# Altium PCB docking-control.PcbDoc
Units mil, origin at the board's own origin, x right, y up, seen from the top; angles counter-clockwise.
Board outline 2305 x 3965 mil, 2 copper layers (Top Layer, Bottom Layer); 18 components, 22 nets, 98 pads, 0 vias.
Unrouted connection lines stored in the file: 3.
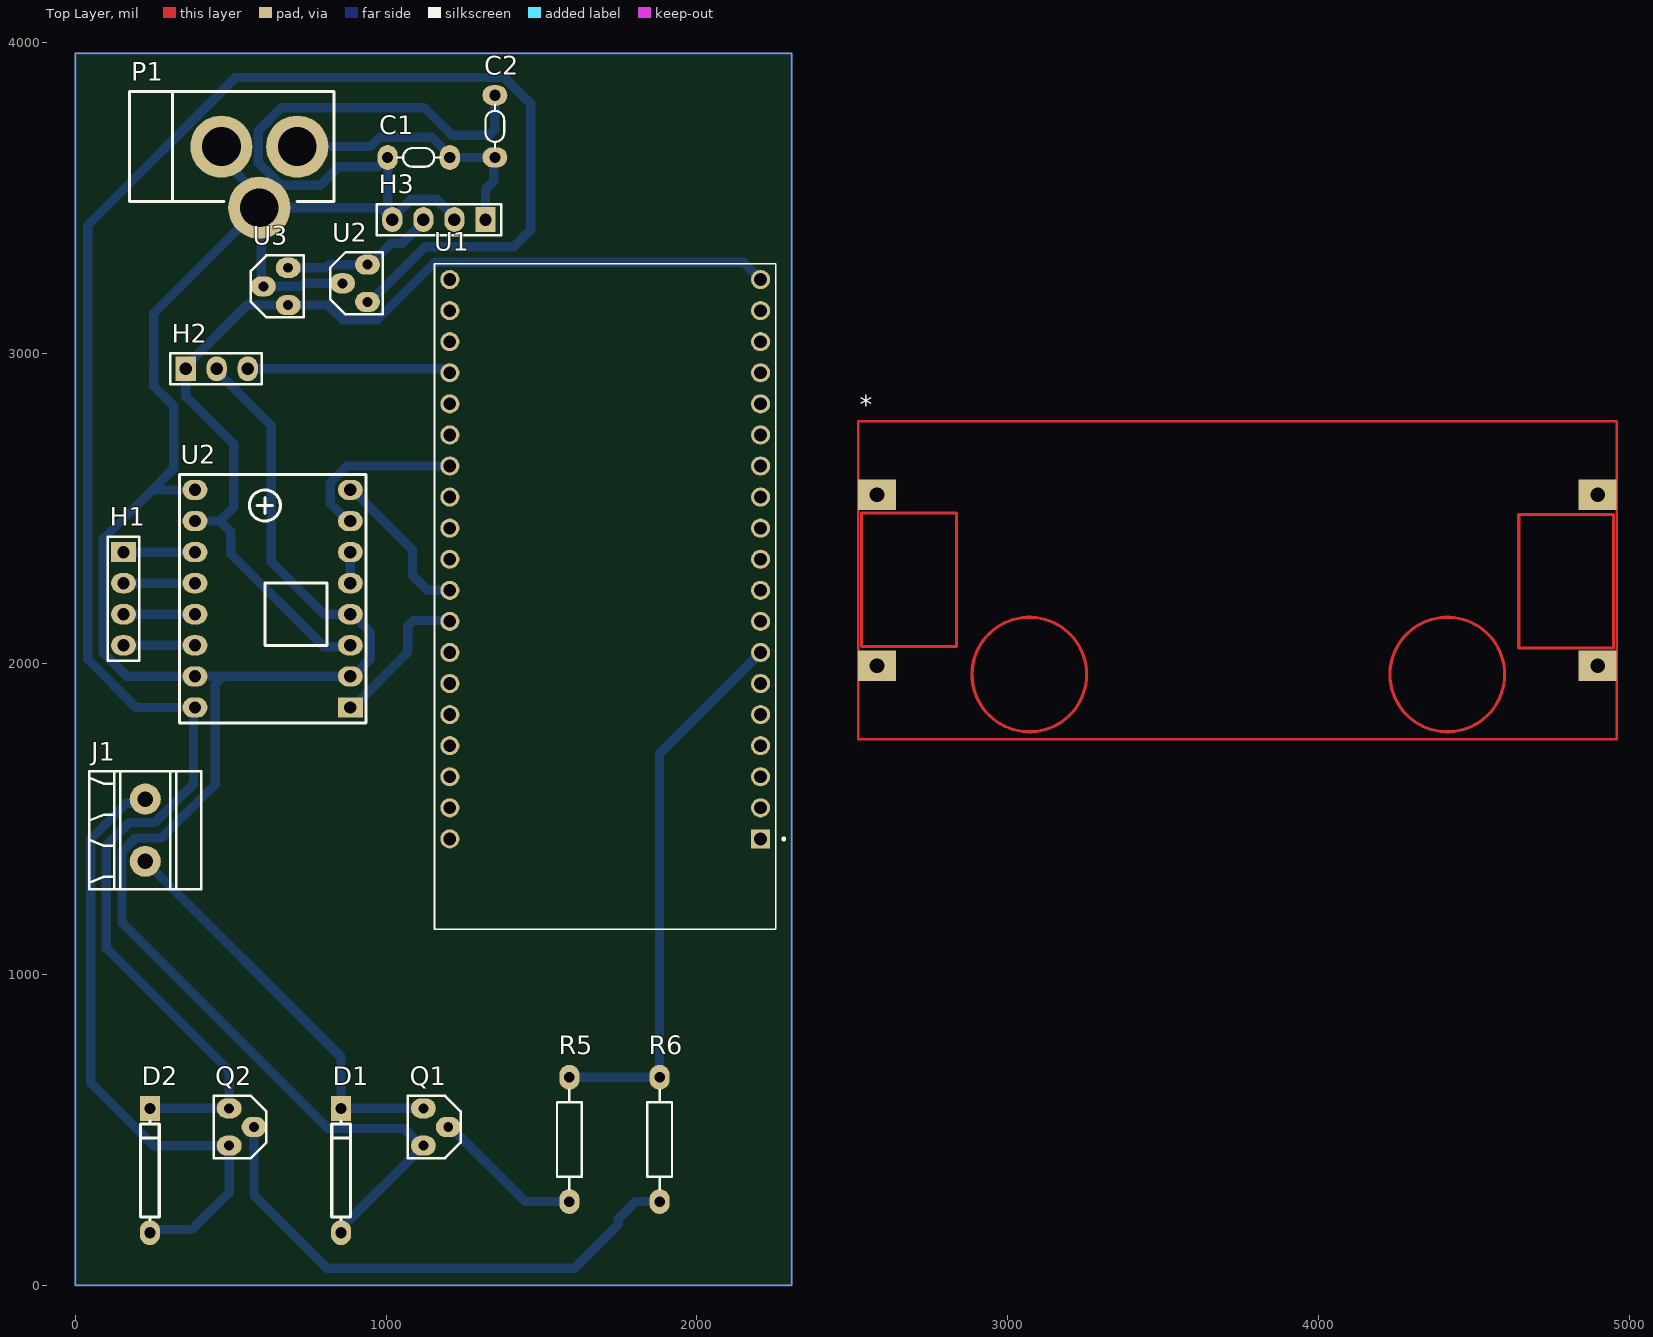
[diagram p0: Top Layer view]
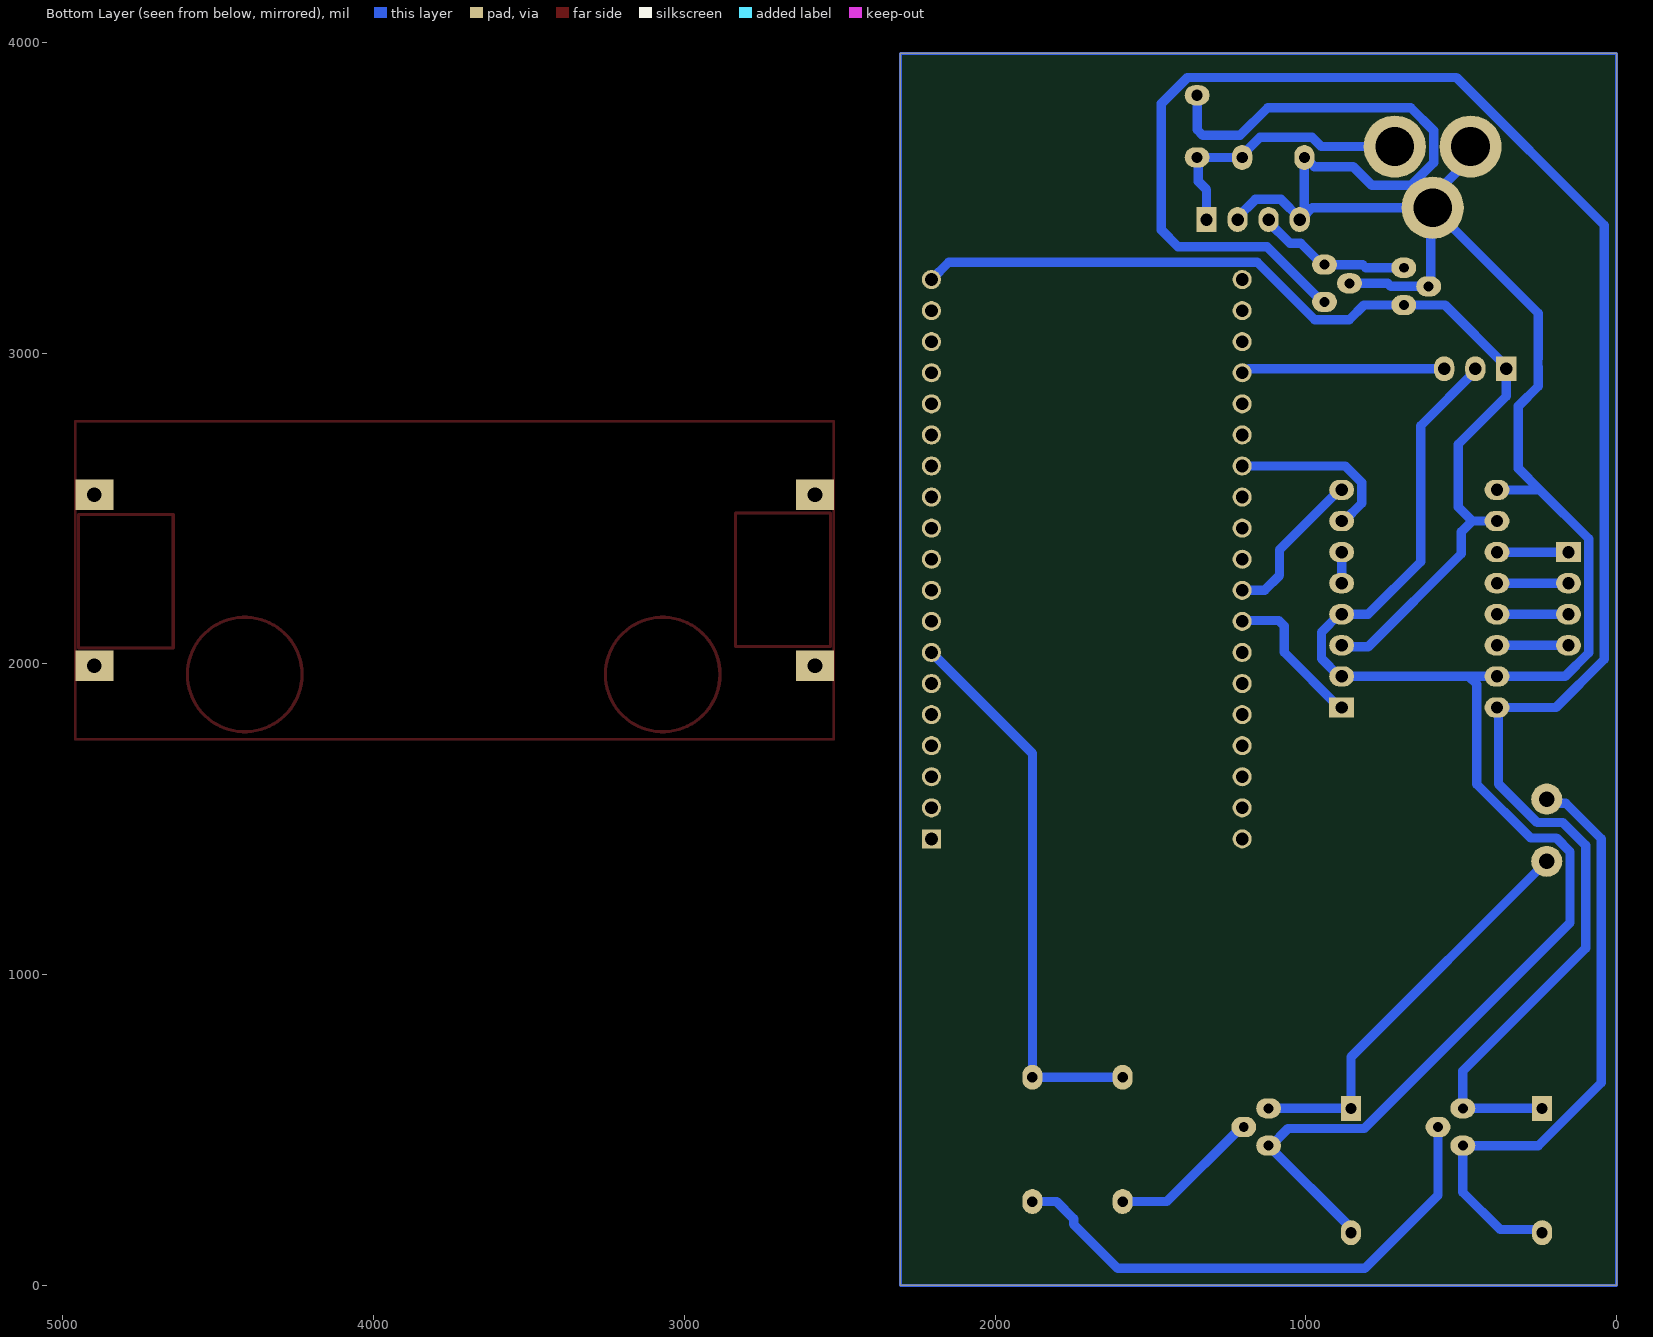
[diagram p1: Bottom Layer view, seen from below]

## Layer stack, top to bottom
Top Solder: solder mask 0.4, Solder Resist, Dk 3.5
Top Layer: signal copper 1.4
Dielectric 1: dielectric 12.6, FR-4, Dk 4.8
Bottom Layer: signal copper 1.4
Bottom Solder: solder mask 0.4, Solder Resist, Dk 3.5

## Board outline
0,0 0,3965 2305,3965 2305,0

## Design rules (kind name [scope] priority, off if disabled: settings)
Clearance [All] p1: gap=10 ignorepadtopadclearanceinfootprint=FALSE except(0: Arc-Hole Track-Hole SMDPad-Hole THPad-Hole Via-Hole Fill-Hole Poly-Hole Region-Hole Text-Hole; 20: Arc-Arc Arc-Track Track-Track)
PolygonConnect [All] p1: connectstyle=Relief reliefconductorwidth=10 reliefentries=4 polygonreliefangle="90 Angle" airgapwidth=10
RoomDefinition docking-control [InComponentClass('docking-control')] p1: confinementstyle=ConfineIn formatcopy=TRUE lockcomponents=FALSE outline 2690,385 3815,385 3815,1305 2690,1305
RoutingVias [All] p1: holewidth=28 width=50 viastyle="Through Hole" minholewidth=28 minwidth=50 maxholewidth=28 maxwidth=50
SolderMaskExpansion [All] p1: expansion=4 istentingtop=FALSE
Width [All] p1: maxlimit=30 minlimit=20 preferedwidth=30 minimp=50.000000 maximp=50.000000 favimp=50.000000
30 further rules are at their usual default settings.

## Components (designator, comment, footprint, x,y, rotation, side; value= is the part's Value field where it differs from the comment)
* "XL4015 5A DC-DC Buck Module" "XL4015 5A DC-DC Buck Module-Footprint-1" 4959.92,2781.22 r180 top
C1 "Cap" RAD200_A 1205,3630 r180 top value=100u
C2 "Cap" RAD200_A 1350,3630 r90 top value=0.1u
D1 "1N4007" DIODE400 855,170 r90 top
D2 "1N4007" DIODE400 240,170 r90 top
H1 "Header 4" HDR1X4 155,2360 r270 top
H2 "Header 3" HDR1X3 355,2950 r0 top
H3 "Header 4" HDR1X4 1320,3430 r180 top
J1 "Screw_5.08_2" ScrewTerm_2.54_2 225,1365 r90 top
P1 "PWR_SOCKET_3.1" PWR_SOCKET_3.1 714.09,3665 r180 top
Q1 "BC337-16" TO-92A 1120,510 r90 top
Q2 "BC337-16" TO-92A 495,510 r90 top
R5 "Res" AXIAL400 1590,470 r270 top value=1k
R6 "Res" AXIAL400 1880,470 r270 top value=1k
U1 "ESP32-DEVKITC-32D" MODULE_ESP32-DEVKITC-32D 1705,2215 r180 top
U2 "TO92 regulator" TO-92A 940,3225 r270 top
U2 "A4988_carrier" DIP-16x500 885,1860 r90 top
U3 "TO92 regulator" TO-92A 685,3215 r270 top

## Footprints (in the part's own frame and the unit in brackets; to place one, negate y for a bottom-side part, rotate by r counter-clockwise, add the part's x,y. Pads: shape width x height; smd on the part's side, far side on the other; paste and mask are expansions set on the pad)
AXIAL400 [mil]
  oval 80x65 hole 33.46: 1(-200,0) 2(200,0)
  silkscreen extent -160,-40 160,40
DIODE400 [mil]
  oval 80x65 hole 36: 1(0,0)
  rect 80x65 hole 36: 2(400,0)
  silkscreen extent 41,-30 359,30
DIP-16x500 [mil]
  rect 65x80 hole 40: 1(0,0)
  oval 65x80 hole 40: 2(100,0) 3(200,0) 4(300,0) 5(400,0) 6(500,0) 7(600,0) 8(700,0) 9(700,500) 10(600,500) 11(500,500) 12(400,500) 13(300,500) 14(200,500) 15(100,500) 16(0,500)
  silkscreen extent -50,-50 750,550
HDR1X3 [mil]
  rect 65x80 hole 40: 1(0,0)
  oval 65x80 hole 40: 2(100,0) 3(200,0)
  silkscreen extent -50,-50 245,50
HDR1X4 [mil]
  rect 65x80 hole 40: 1(0,0)
  oval 65x80 hole 40: 2(100,0) 3(200,0) 4(300,0)
  silkscreen extent -50,-50 350,50
MODULE_ESP32-DEVKITC-32D [mm]
  rect 1.56x1.56 / inner round 1.56 / far side rect 1.56x1.56 hole 1.04: J2-1(-12.7,19.76)
  round 1.56 hole 1.04: J2-2(-12.7,17.22) J2-3(-12.7,14.68) J2-4(-12.7,12.14) J2-5(-12.7,9.6) J2-6(-12.7,7.06) J2-7(-12.7,4.52) J2-8(-12.7,1.98) J2-9(-12.7,-0.56) J2-10(-12.7,-3.1) J2-11(-12.7,-5.64) J2-12(-12.7,-8.18) J2-13(-12.7,-10.72) J2-14(-12.7,-13.26) J2-15(-12.7,-15.8) J2-16(-12.7,-18.34) J2-17(-12.7,-20.88) J2-18(-12.7,-23.42) J2-19(-12.7,-25.96) J3-1(12.7,19.76) J3-2(12.7,17.22) J3-3(12.7,14.68) J3-4(12.7,12.14) J3-5(12.7,9.6) J3-6(12.7,7.06) J3-7(12.7,4.52) J3-8(12.7,1.98) J3-9(12.7,-0.56) J3-10(12.7,-3.1) J3-11(12.7,-5.64) J3-12(12.7,-8.18) J3-13(12.7,-10.72) J3-14(12.7,-13.26) J3-15(12.7,-15.8) J3-16(12.7,-18.34) J3-17(12.7,-20.88) J3-18(12.7,-23.42) J3-19(12.7,-25.96)
  silkscreen extent -14.7,-27.25 13.95,27.15, body extent -13.97,-24.8 13.97,30.3, height 3.25
PWR_SOCKET_3.1 [mm]
  round 5.08 hole 3.175: 1(0,0) 2(3.1,5) 3(6.2,0)
  silkscreen extent -3,-4.5 13.7,4.5
RAD200_A [mil]
  oval 65x80 hole 36: 1(0,0) 2(200,0)
  silkscreen extent 30,-30 170,30
ScrewTerm_2.54_2 [mil] "2-way 200 mil pitch screw terminal connector"
  round 100 hole 50: 1(0,0) 2(200,0)
  silkscreen extent -90,-180 290,180
TO-92A [mil]
  oval 65x80 hole 32: 1(60,0) 2(0,-80) 3(-60,0)
  silkscreen extent -100,-120 100,50
"XL4015 5A DC-DC Buck Module-Footprint-1" [mm]
  rect 3.1x2.5 hole 1.2: 1(1.55,20) 2(1.55,6) 3(60.45,6) 4(60.45,20)
  Top Layer circle w0.254: c48.006,20.701 r4.684
  Top Layer circle w0.254: c13.843,20.701 r4.684
  Top Layer lines w0.2: 62,26 62,0 0,0 0,26 62,26
  Top Layer lines w0.254: 61.722,18.415 61.722,7.493 53.975,7.493 53.975,18.415 61.722,18.415 ; 8.001,18.542 8.001,7.62 0.254,7.62 0.254,18.542 8.001,18.542

## Part data
*: library part CMP-00030-00002-1
C1 C2: "Capacitor", Manufacturer="Generic Components", Class=Passive, Published=08/06/2000, Publisher="Altium Hobart Technology Centre", SubClass=Capacitor
D1 D2: "1.0 Ampere General Purpose Rectifier", Manufacturer="Fairchild Semiconductor", Class=Discrete, Published=8/06/2000, Publisher="Altium Hobart Technology Centre", Revised="11-July-2000: SIM Model Added.", SubClass="Rectifier - Standard Recovery"
H1 H3: "Header, 4-Pin", Manufacturer="Generic Components", Class=Connector
H2: "Header, 3-Pin", Manufacturer="Generic Components", Class=Connector
J1: "2 way screw terminal connector"
Q1 Q2: "NPN BJT"
R5 R6: "Resistor", Manufacturer="Generic Components", Class=Passive, Published=08/06/2000, Publisher="Altium Hobart Technology Centre", SubClass=Resistor
U1: "WiFi Development Tools (802.11) ESP32 General Development Kit, ESP32-WROOM-32D on the board", Package=None, Check_prices=https://www.snapeda.com/parts/ESP32-DEVKITC-32D/Espressif+Systems/view-part/?ref=eda, MF="Espressif Systems", MP=ESP32-DEVKITC-32D, SnapEDA_Link=https://www.snapeda.com/parts/ESP32-DEVKITC-32D/Espressif+Systems/view-part/?ref=snap
U2 U3: library part REG_TO92, "Positive Regulator  3.3V, 5V", PackageDocument=revC, ComponentLink1Description="Manufacturer Link", ComponentLink1URL=http://www.ti.com/, DatasheetDocument=Sep-1997, LatestRevisionDate=17-Jul-2002, LatestRevisionNote="Re-released for DXP Platform.", PackageReference=ZZ311, Published=8-Jun-2000, Publisher="Altium Limited"
U2: "Carrier pcb for A4988 stepper driver"

## Nets (pads, with @x,y where several pads share a name; then routed paths per layer and width w, separated by ;. In a path a pad name is that pad's centre, name@x,y a point inside that pad or via, vN(x,y) a via of type N, cw(c..) or ccw(c..) an arc to the next point about the centre after c; other vN are vias at no path point)
+5: H2.1 U1.J2-19 U2.3@885,2060 U2.10 U2.16 U3.1 | length 3346.6
  Bottom Layer w30: U2.10 465,2460 ; U2.3@885,2060 880,2055 800,2055 500,2355 500,2425 465,2460 ; U1.J2-19@2207.95,3240 U1.J2-19 2149.29,3292.76 1156.57,3292.76 971.32,3107.5 860.39,3107.5 812.89,3155 U3.1 552.5,3155 355,2957.5 H2.1 355,2861.89 510,2706.89 510,2505 465,2460
+14.8: *.4
+15: D2.2 Q2.1 U2.1@940,3165 | length 6351.3
  Bottom Layer w30: D2.2 Q2.1@487.5,570 ; 380,1855 380,1613.93 256.07,1490 173.22,1490 100,1416.78 100,1085 495,690 Q2.1 ; 385,1860 195.47,1860 40,2015.47 40,3411.78 515.72,3887.5 1381.32,3887.5 1465,3803.82 1465,3396.43 1411.32,3342.76 1125.26,3342.76 947.5,3165 U2.1@940,3165
+18: *.1 H3.3 U2.3@940,3285 U3.3 | length 503.6
  Bottom Layer w30: U3.3 807.5,3275 817.5,3285 940,3285 947.5,3285 1016.25,3353.75 1051.25,3353.75 1120,3422.5 H3.3
adc_in: U1.J2-6
before: D2.1 J1.2 Q2.3 | length 2000.7
  Bottom Layer w30: J1.2 211.61,1551.61 164.12,1551.61 50,1437.49 50,652.14 252.14,450 Q2.3 495,300 375,180 250,180 D2.1
button_out: U1.J2-9
GND: *.2 *.3 C1.2 C2.2 D1.1 H2.2 H3.2 H3.4 P1.2 P1.3 Q1.3 U2.2 U2.4 U2.9 U2.15 U3.2 | length 9780.3
  Bottom Layer w30: U2.9 247.14,2560 ; H2.2 455,2942.5 630.85,2766.65 630.85,2329.15 800,2160 U2.4 892.5,2160 950,2102.5 950,2017.5 892.5,1960 885,1960 475,1960 ; P1.3 470,3627.6 592.05,3505.55 P1.2 ; D1.1 855,185 Q1.3 1112.5,450 1057.5,505 812.14,505 150,1167.14 150,1396.07 193.93,1440 276.78,1440 450,1613.22 450,1935 475,1960 ; U2.2@860,3225 736.25,3225 726.25,3215 U3.2 598.52,3221.48 598.52,3461.67 P1.2 ; C1.2@995.52,3639.48 995.52,3622.49 973.55,3600.52 848.19,3600.52 787.67,3540 662.32,3540 589.09,3613.22 589.09,3716.78 662.32,3790 1123.21,3790 1211.97,3701.24 1332.43,3701.24 1350,3718.82 C2.2 ; C1.2 1005,3461.97 1020,3446.97 H3.4 1018.03,3430 995.53,3452.5 979.88,3468.15 P1.2 ; H3.4@1020,3434.68 1080.32,3495 1162.5,3495 1220,3437.5 H3.2 ; 247.14,2560 316.18,2629.04 316.18,2830 252.5,2893.68 252.5,2956.32 253.16,2956.98 253.16,2981.84 252.5,2982.5 252.5,3128.6 P1.2 ; 247.14,2560 90,2402.86 90,2036.18 166.18,1960 U2.15 475,1960
lm_in: H2.3 U1.J3-16 | length 655.4
  Bottom Layer w30: H2.3 1183.55,2950 1196.5,2937.05 U1.J3-16
NetC1_1: C1.1 C2.1 H3.1 P1.1 | length 886.4
  Bottom Layer w30: P1.1 950.33,3665 980.33,3695 1147.5,3695 1205,3637.5 C1.1 C2.1 ; H3.1 1320,3526.51 1345.99,3552.5 C2.1@1345.99,3625.99
NetD1_2: D1.2 J1.1 Q1.1 | length 1321
  Bottom Layer w30: J1.1 855,735 D1.2 Q1.1
NetQ1_2: Q1.2 R5.2 | length 489.4
  Bottom Layer w30: Q1.2 1207.5,510 1447.5,270 R5.2
NetQ2_2: Q2.2 R6.2 | length 1721.5
  Bottom Layer w30: Q2.2 575,290.47 810.47,55 1605.24,55 1747.5,197.26 1747.5,215 1802.5,270 R6.2
NetU2_5: U2.5 U2.6 | length 100
  Bottom Layer w30: U2.5 U2.6
sm_1: H1.1 U2.11 | length 230
  Bottom Layer w30: H1.1 U2.11
sm_2: H1.2 U2.12 | length 230
  Bottom Layer w30: H1.2 U2.12
sm_3: H1.3 U2.13 | length 230
  Bottom Layer w30: H1.3 U2.13
sm_4: H1.4 U2.14 | length 230
  Bottom Layer w30: H1.4 U2.14
stepper_dir: U1.J3-9 U2.8 | length 502.1
  Bottom Layer w30: U2.8 892.5,2560 1085,2367.5 1085,2285 1132.95,2237.05 U1.J3-9
stepper_en: U1.J3-8 U2.1@885,1860 | length 487
  Bottom Layer w30: U2.1@885,1860 892.5,1860 1070,2037.5 1070,2122.43 1087.57,2140 1202.05,2140 U1.J3-8
stepper_pwm: U1.J3-13 U2.7 | length 562.2
  Bottom Layer w30: U2.7 877.5,2460 820,2517.5 820,2583.82 873.23,2637.05 U1.J3-13
sw1_en: R5.1 R6.1 U1.J2-7 | length 1791.7
  Bottom Layer w30: R5.1 R6.1 1880,1712.05 U1.J2-7
pads on no net: U1.J2-1 U1.J2-2 U1.J2-3 U1.J2-4 U1.J2-5 U1.J2-8 U1.J2-10 U1.J2-11 U1.J2-12 U1.J2-13 U1.J2-14 U1.J2-15 U1.J2-16 U1.J2-17 U1.J2-18 U1.J3-1 U1.J3-2 U1.J3-3 U1.J3-4 U1.J3-5 U1.J3-6 U1.J3-7 U1.J3-10 U1.J3-11 U1.J3-12 U1.J3-14 U1.J3-15 U1.J3-17 U1.J3-18 U1.J3-19
copper on no net: | length 12540
  Bottom Layer w10: 0,0 2305,0 2305,3965 0,3965 0,0